# Altium PCB PCB1.PcbDoc
Units mm, origin at the board's own origin, x right, y up, seen from the top; angles counter-clockwise.
Board outline 101.09 x 149.61 mm, 2 copper layers (Top Layer, Bottom Layer); 126 components, 69 nets, 339 pads, 186 vias.
Unrouted connection lines stored in the file: 63.
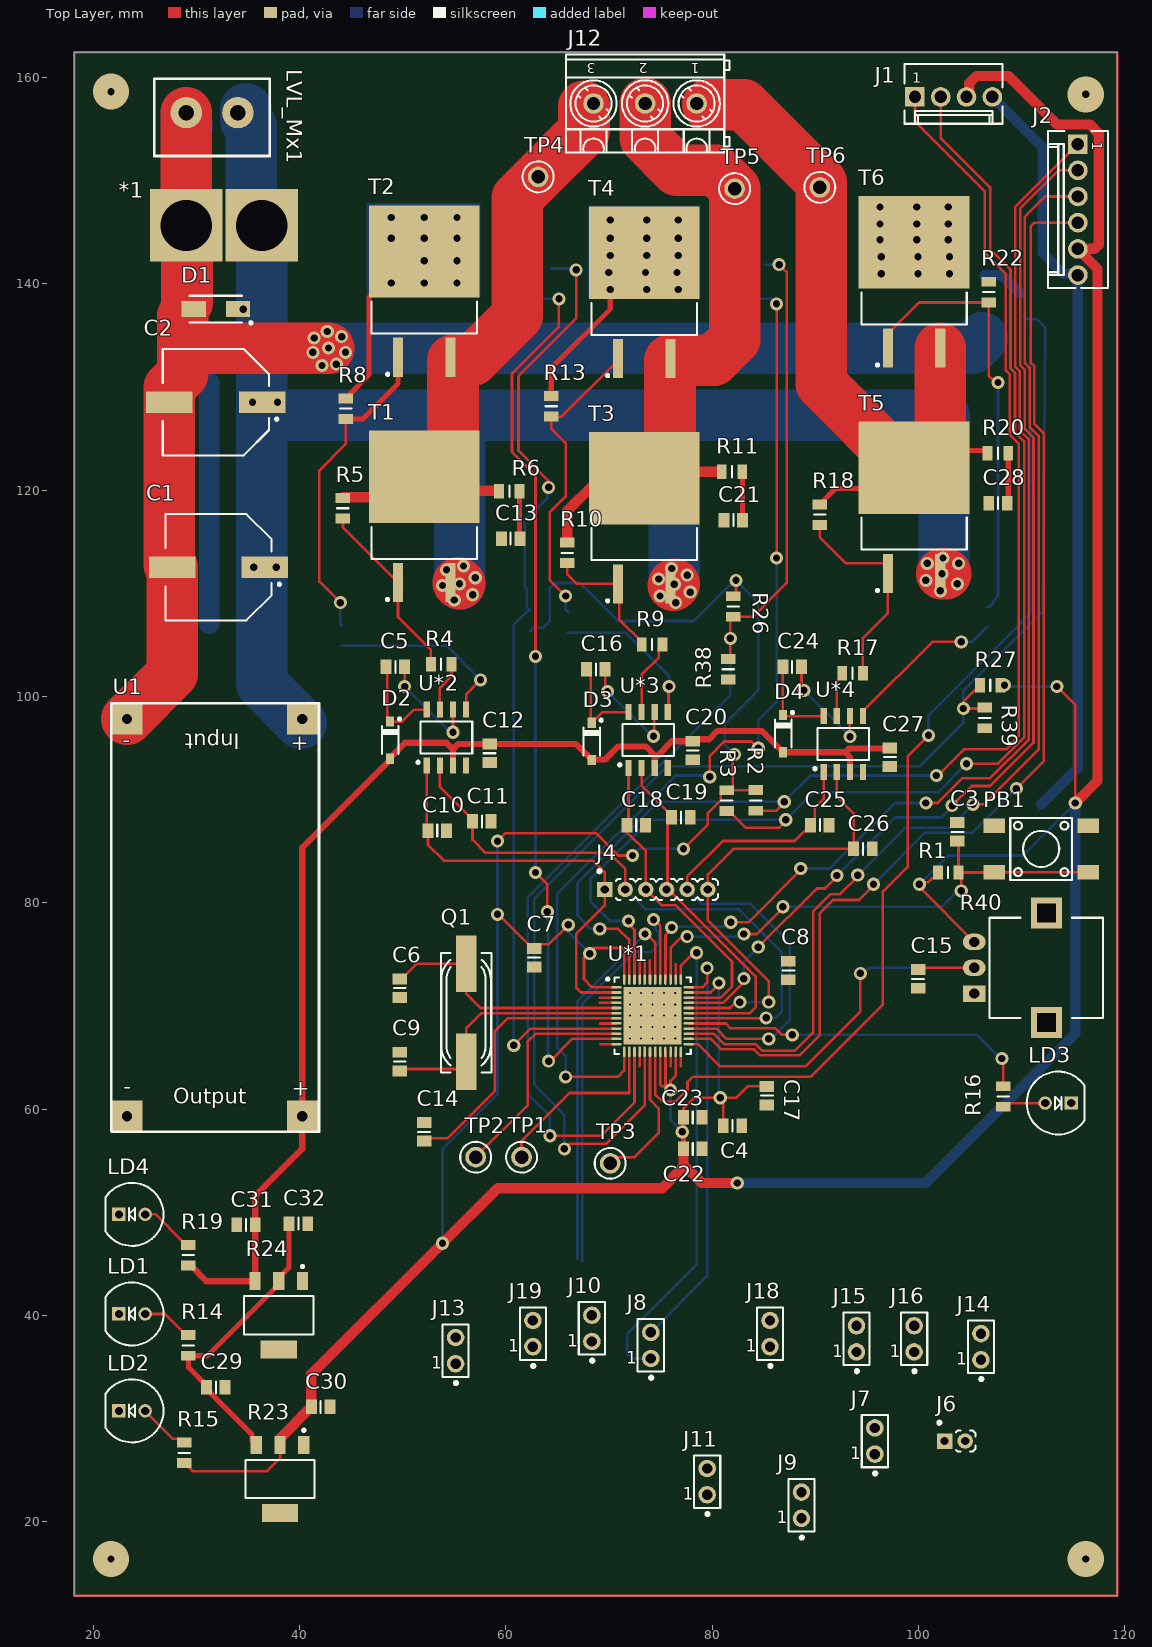
[diagram p0: Top Layer view]
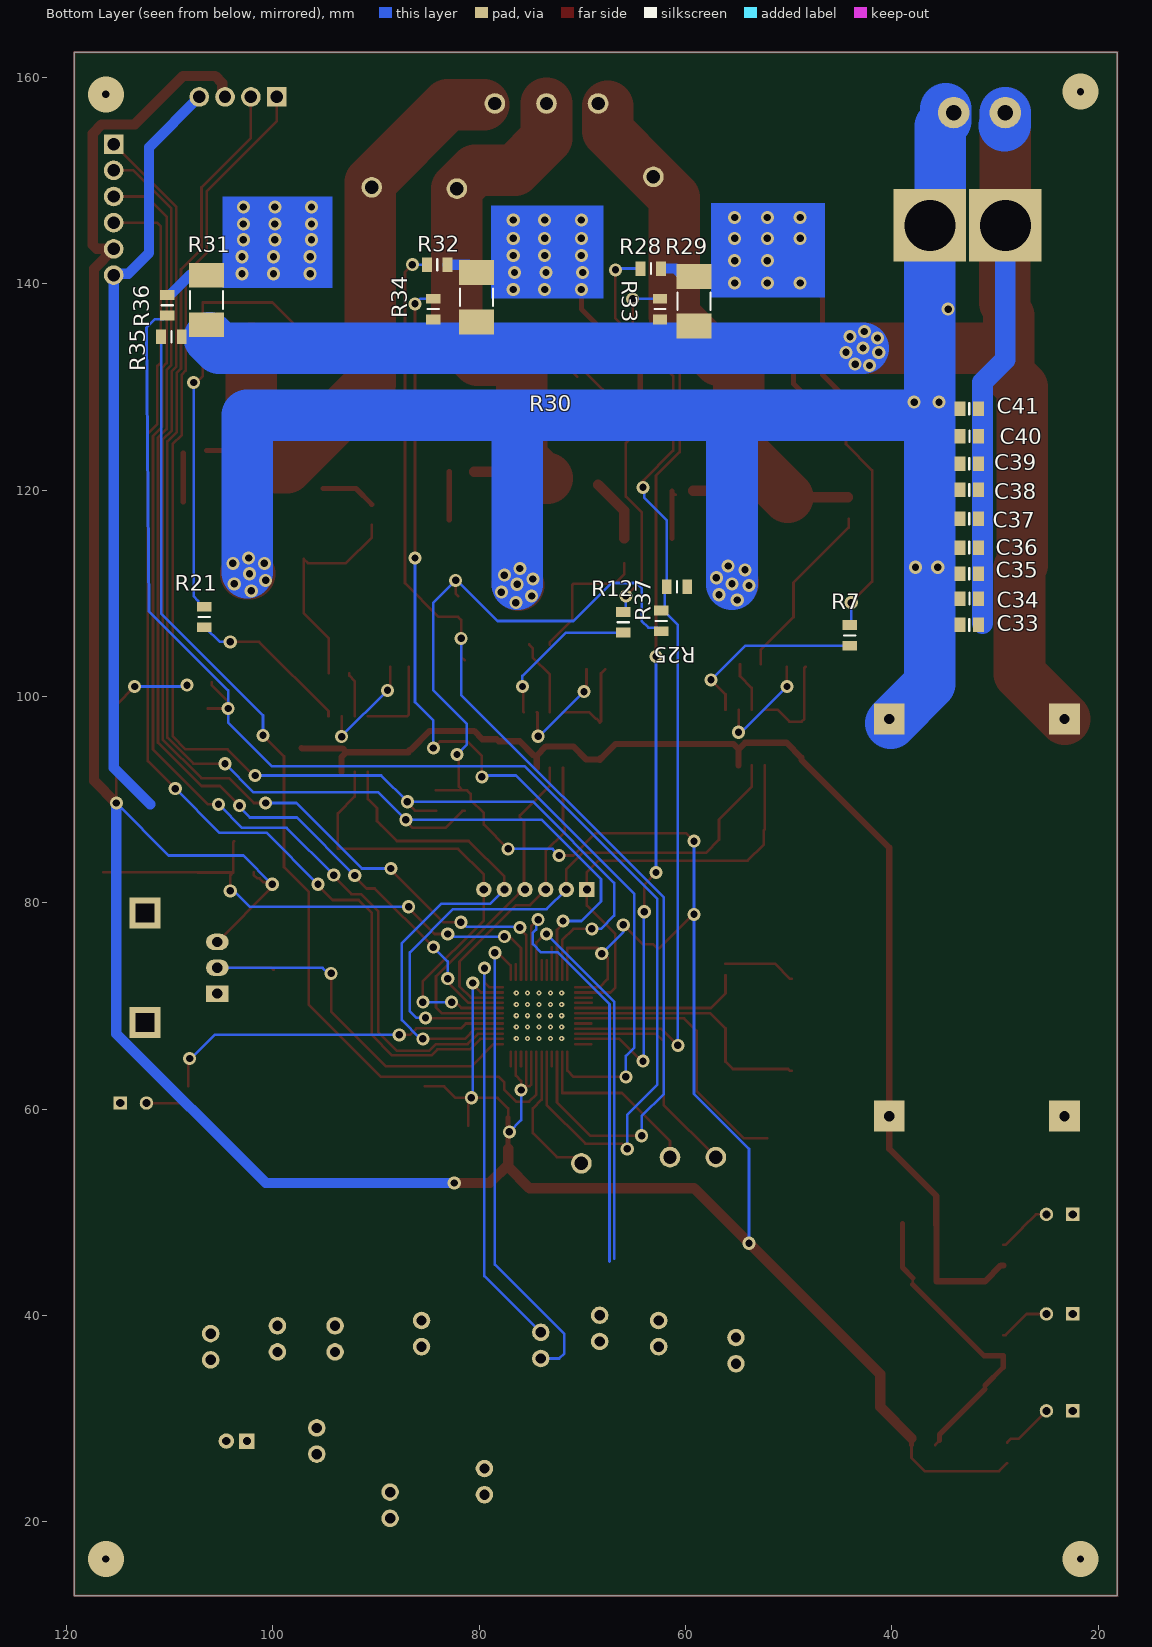
[diagram p1: Bottom Layer view, seen from below]
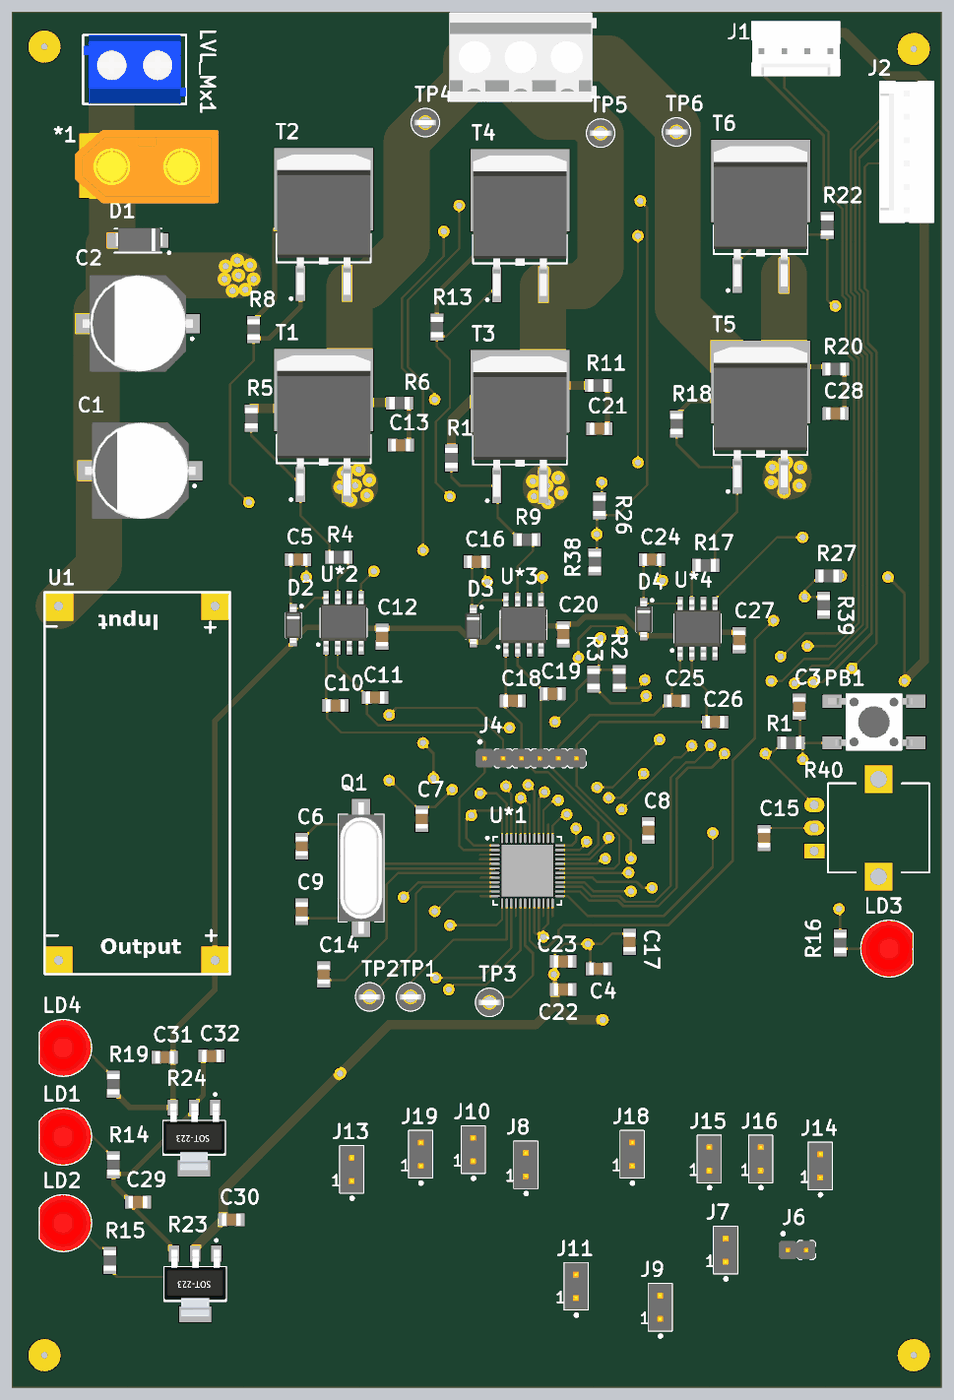
[diagram p2: 3D render of the assembled board from above, using the file's embedded part models]
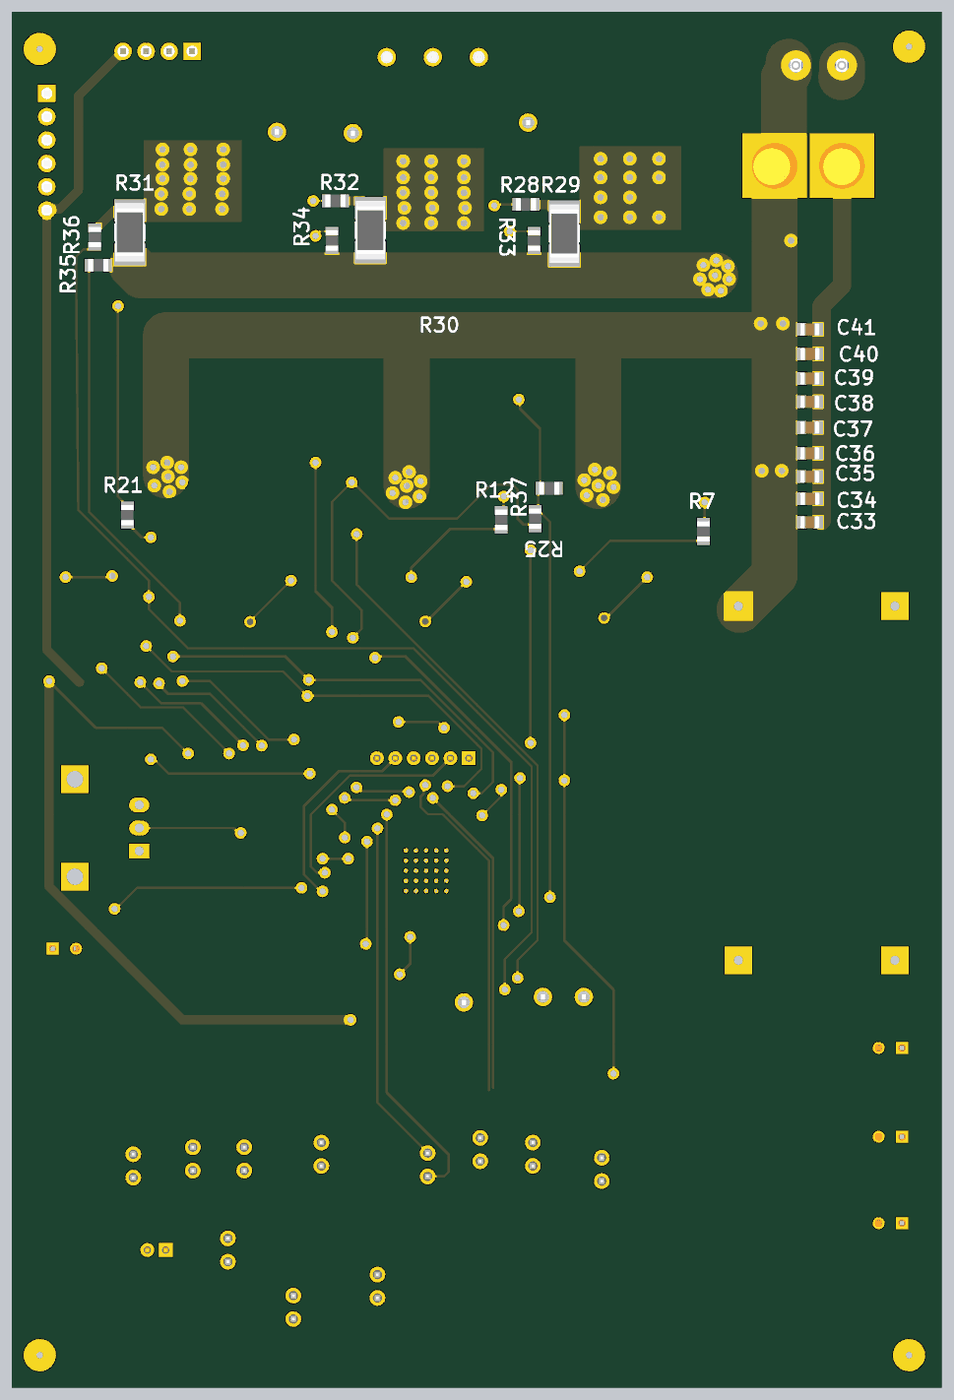
[diagram p3: 3D render of the assembled board from below, using the file's embedded part models]

## Layer stack, top to bottom
Top Solder: solder mask 0.0102, Solder Resist, Dk 3.5
Top Layer: signal copper 0.0356
Dielectric 1: dielectric 0.32, FR-4, Dk 4.8
Bottom Layer: signal copper 0.0356
Bottom Solder: solder mask 0.0102, Solder Resist, Dk 3.5

## Board outline
18.161,12.827 18.161,162.433 119.253,162.433 119.253,12.827

## Design rules (kind name [scope] priority, off if disabled: settings)
Clearance [All] p1: gap=0.2 ignorepadtopadclearanceinfootprint=FALSE
PolygonConnect [All] p1: connectstyle=Relief reliefconductorwidth=0.254 reliefentries=4 polygonreliefangle="90 Angle" airgapwidth=0.254
RoutingVias [All] p1: holewidth=0.711 width=1.27 viastyle="Through Hole" minholewidth=0.711 minwidth=1.27 maxholewidth=0.711 maxwidth=1.27
SolderMaskExpansion [All] p1: expansion=0.102
Width 10V [InNetClass('+10V')] p1: maxlimit=1.5 minlimit=0.5 preferedwidth=0.6
Width GND_width [InNet('GND')] p2: maxlimit=5 minlimit=0.254 preferedwidth=5
Width Power_width [InNetClass('Power')] p3: maxlimit=7 minlimit=3 preferedwidth=5
Width [All] p4: maxlimit=0.254 minlimit=0.2 preferedwidth=0.254
30 further rules are at their usual default settings.

## Classes and differential pairs
net class +10V: +10
net class GND: GND
net class Power: OUT1 OUT2 OUT3 V+ Vshunt_1+ Vshunt_2+ Vshunt_3+

## Components (designator, comment, footprint, x,y, rotation, side; value= is the part's Value field where it differs from the comment)
*1 "XT-60 Connector" XT-60 40.716,149.708 r180 top
C1 "680uF" CAPAE1030X1020N 32.131,112.522 r180 top
C2 "680uF" CAPAE1030X1020N 31.877,128.524 r180 top
C3 "10uF" CAPC2012X135N 103.759,86.868 r90 top
C4 "10uF" CAPC2012X135N 81.958,58.377 r180 top
C5 "10uF" CAPC2012X135N 49.276,102.87 r0 top
C6 "16pF" CAPC2012X135N 49.7,71.712 r90 top value=10uF
C7 "10uF" CAPC2012X135N 62.738,74.676 r90 top
C8 "10uF" CAPC2012X135N 87.376,73.426 r270 top
C9 "16pF" CAPC2012X135N 49.7,64.6 r270 top value=10uF
C10 "10uF" CAPC2012X135N 53.34,86.995 r180 top
C11 "10uF" CAPC2012X135N 57.658,87.884 r180 top
C12 "10uF" CAPC2012X135N 58.42,94.488 r90 top
C13 "10uF" CAPC2012X135N 60.452,115.3 r0 top
C14 "10uF" CAPC2012X135N 52.07,57.785 r270 top
C15 "10uF" CAPC2012X135N 99.949,72.612 r90 top
C16 "10uF" CAPC2012X135N 68.707,102.627 r0 top
C17 "10uF" CAPC2012X135N 85.3,61.298 r90 top
C18 "10uF" CAPC2012X135N 72.633,87.514 r180 top
C19 "10uF" CAPC2012X135N 76.962,88.276 r180 top
C20 "10uF" CAPC2012X135N 78.105,94.753 r90 top
C21 "10uF" CAPC2012X135N 82.042,117.094 r0 top
C22 "10uF" CAPC2012X135N 78.105,56.134 r180 top
C23 "10uF" CAPC2012X135N 78.105,59.182 r180 top
C24 "10uF" CAPC2012X135N 87.746,102.87 r0 top
C25 "10uF" CAPC2012X135N 90.424,87.514 r180 top
C26 "10uF" CAPC2012X135N 94.604,85.217 r180 top
C27 "10uF" CAPC2012X135N 97.226,94.107 r90 top
C28 "10uF" CAPC2012X135N 107.696,118.745 r0 top
C29 "10uF" CAPC2012X135N 31.877,33.02 r180 top
C30 "10uF" CAPC2012X135N 42.037,31.115 r180 top
C31 "10uF" CAPC2012X135N 34.798,48.768 r0 top
C32 "10uF" CAPC2012X135N 39.878,48.895 r180 top
C33 "15uF" CAPC2012X135N 32.501,106.934 r0 bottom value=1.2pF
C34 "15uF" CAPC2012X135N 32.49,109.474 r0 bottom value=1.2pF
C35 "15uF" CAPC2012X135N 32.501,111.887 r0 bottom value=1.2pF
C36 "15uF" CAPC2012X135N 32.501,114.427 r0 bottom value=1.2pF
C37 "15uF" CAPC2012X135N 32.501,117.221 r0 bottom value=1.2pF
C38 "15uF" CAPC2012X135N 32.501,120.015 r0 bottom value=1.2pF
C39 "15uF" CAPC2012X135N 32.501,122.555 r0 bottom value=1.2pF
C40 "15uF" CAPC2012X135N 32.49,125.222 r0 bottom value=1.2pF
C41 "15uF" CAPC2012X135N 32.501,127.889 r0 bottom value=1.2pF
D1 "ES1G-13-F" DIOM5226X230N 31.877,137.541 r180 top
D2 "=Device" SOD3716X135N 48.768,95.758 r270 top
D3 "=Device" SOD3716X135N 68.326,95.642 r270 top
D4 "=Device" SOD3716X135N 86.868,96.393 r270 top
J1 "KK®" MOLEX_22-04-1041 103.398,158.115 r0 top
J2 "KK®" MOLEX_22-27-2061 115.443,147.193 r270 top
J4 "=Family" HARWIN_M22-F2010605 69.565,81.28 r0 top
J6 "Header 2" HARWIN_M22-2010205 102.521,27.813 r0 top
J7 "Header 2" SAMTEC_TSW-101-23-L-D 95.758,27.813 r0 top
J8 "Header 2" SAMTEC_TSW-101-23-L-D 74.041,37.084 r0 top
J9 "Header 2" SAMTEC_TSW-101-23-L-D 88.646,21.59 r0 top
J10 "Header 2" SAMTEC_TSW-101-23-L-D 68.326,38.735 r0 top
J11 "Header 2" SAMTEC_TSW-101-23-L-D 79.502,23.876 r0 top
J12 "Terminal" WIELAND_25.161.0353.0 73.486,157.48 r180 top
J13 "Header 2" SAMTEC_TSW-101-23-L-D 55.118,36.576 r0 top
J14 "Header 2" SAMTEC_TSW-101-23-L-D 106.045,36.957 r0 top
J15 "Header 2" SAMTEC_TSW-101-23-L-D 93.98,37.719 r0 top
J16 "Header 2" SAMTEC_TSW-101-23-L-D 99.568,37.719 r0 top
J18 "Header 2" SAMTEC_TSW-101-23-L-D 85.598,38.227 r0 top
J19 "Header 2" SAMTEC_TSW-101-23-L-D 62.611,38.227 r0 top
LD1 "Red" LED_5MM_RED_1C-2A 23.749,40.132 r0 top
LD2 "Red" LED_5MM_RED_1C-2A 23.749,30.734 r0 top
LD3 "Red" LED_5MM_RED_1C-2A 113.538,60.579 r180 top
LD4 "Red" LED_5MM_RED_1C-2A 23.749,49.784 r0 top
LVL_Mx1 "Barrier Block 2 Conn" "2 Barrier Block 5mm" 34.107,157.691 r180 top
PB1 "Push Button" PB_TYCO_FSM2JSMA 111.887,85.217 r90 top
Q1 "10MHz" XTAL1160X490X430 56.134,69.342 r90 top
R1 "40k2" RESC2012X60N 102.87,82.931 r0 top
R2 "40k2" RESC2012X60N 84.201,89.916 r90 top
R3 "40k2" RESC2012X60N 81.407,89.9 r90 top
R4 "40k2" RESC2012X60N 53.721,103.124 r180 top
R5 "40k2" RESC2012X60N 44.196,118.237 r270 top
R6 "40k2" RESC2012X60N 60.325,119.888 r180 top
R7 "40k2" RESC2012X60N 44.069,105.918 r90 bottom
R8 "40k2" RESC2012X60N 44.45,127.889 r270 top
R9 "40k2" RESC2012X60N 74.168,105.029 r180 top
R10 "40k2" RESC2012X60N 65.956,113.919 r270 top
R11 "40k2" RESC2012X60N 81.915,121.777 r180 top
R12 "40k2" RESC2012X60N 66.04,107.188 r90 bottom
R13 "40k2" RESC2012X60N 64.389,128.127 r270 top
R14 "40k2" RESC2012X60N 29.21,37.084 r90 top
R15 "40k2" RESC2012X60N 28.829,26.67 r90 top
R16 "40k2" RESC2012X60N 108.204,61.214 r270 top
R17 "40k2" RESC2012X60N 93.599,102.235 r0 top
R18 "40k2" RESC2012X60N 90.424,117.618 r270 top
R19 "40k2" RESC2012X60N 29.21,45.831 r90 top
R20 "40k2" RESC2012X60N 107.696,123.571 r180 top
R21 "40k2" RESC2012X60N 106.68,107.696 r90 bottom
R22 "40k2" RESC2012X60N 106.807,139.192 r270 top
R23 "310030097" SOT-223 38.1,24.13 r180 top
R24 "310030096" SOT-223 37.973,40.005 r180 top
R25 "40k2" RESC2012X60N 62.357,107.315 r270 bottom
R26 "40k2" RESC2012X60N 82.042,108.712 r90 top
R27 "40k2" RESC2012X60N 106.948,101.092 r0 top
R28 "40k2" RESC2012X60N 63.373,141.478 r180 bottom
R29 "0.003" RESC6432X120N 59.182,138.303 r90 bottom value=390k
R30 "0.003" RESC6432X120N 80.264,138.684 r90 bottom value=390k
R31 "0.003" RESC6432X120N 106.426,138.43 r90 bottom value=390k
R32 "40k2" RESC2012X60N 84.074,141.859 r180 bottom
R33 "40k2" RESC2012X60N 62.484,137.541 r90 bottom
R34 "40k2" RESC2012X60N 84.455,137.541 r90 bottom
R35 "40k2" RESC2012X60N 109.843,134.874 r0 bottom
R36 "40k2" RESC2012X60N 110.236,137.922 r90 bottom
R37 "40k2" RESC2012X60N 60.833,110.617 r0 bottom
R38 "40k2" RESC2012X60N 81.534,102.632 r90 top
R39 "40k2" RESC2012X60N 106.426,97.917 r90 top
R40 "PTV09" PTV09A-1x30 105.395,71.194 r0 top
T1 "=Device" TO254P1524X483-3N-R750X1016 52.074,117.435 r90 top
T2 "=Device" TO254P1524X483-3N-R750X1016 52.074,139.279 r90 top
T3 "=Device" TO254P1524X483-3N-R750X1016 73.406,117.308 r90 top
T4 "=Device" TO254P1524X483-3N-R750X1016 73.406,139.152 r90 top
T5 "=Device" TO254P1524X483-3N-R750X1016 99.568,118.324 r90 top
T6 "=Device" TO254P1524X483-3N-R750X1016 99.568,140.168 r90 top
TP1 "Test Point" VERO_20-313145 61.511,55.329 r0 top
TP2 "Test Point" VERO_20-313145 57.066,55.329 r0 top
TP3 "Test Point" VERO_20-313145 70.104,54.737 r0 top
TP4 "Test Point" VERO_20-313145 63.119,150.368 r0 top
TP5 "Test Point" VERO_20-313145 82.169,149.225 r0 top
TP6 "Test Point" VERO_20-313145 90.424,149.352 r0 top
U1 "LM2596 Step Down Voltage regulator" "LM2596 DC-DC" 40.959,98.409 r180 top
U*1 "STM32G431CBT6" STM-UFQFPN48_M 74.211,69.045 r0 top
U*2 "L6387ED" SOIC127P600X175-8N 54.229,96.012 r90 top
U*3 "L6387ED" SOIC127P600X175-8N 73.787,95.769 r90 top
U*4 "L6387ED" SOIC127P600X175-8N 92.71,95.388 r90 top

## Footprints (in the part's own frame and the unit in brackets; to place one, negate y for a bottom-side part, rotate by r counter-clockwise, add the part's x,y. Pads: shape width x height; smd on the part's side, far side on the other; paste and mask are expansions set on the pad)
"2 Barrier Block 5mm" [mm]
  round 3.048 hole 1.5: 1(0.1,1.1) 2(5.1,1.1)
  silkscreen extent -3,-2.2 8.2,5.3, body extent -3,-2.2 8.16,5.3, height 10
CAPAE1030X1020N [mm] "Capacitor, Aluminium Electrolytric, 10.3mm L X 10.3mm W X 10.2mm H, IPC Medium Density"
  rect 4.5x2.1 smd: 1(-4.5,0) 2(4.5,0)
  silkscreen extent -6.03,-5.15 5.15,5.15, body extent -6,-5.25 6,5.25, height 10.2
CAPC2012X135N [mm] "Chip Capacitor, Body 2.0x1.25mm, IPC Medium Density"
  rect 1.05x1.4 smd: 1(-0.9,0) 2(0.9,0)
  silkscreen extent 0,-0.58 0,0.58, body extent -1.05,-0.67 1.05,0.68, height 1.25
DIOM5226X230N [mm] "DO-214-AC/SMA Diode, Molded Body; 5.195mm L X 2.605mm W X 2.30mm H, IPC Medium Density"
  rect 2.35x1.55 smd: 1(-2.15,0) 2(2.15,0)
  silkscreen extent -3.53,-1.3 2.55,1.45, body extent -2.75,-1.4 2.45,1.2, height 2.3
HARWIN_M22-2010205 [mm] "2 Contacts - Pitch 2mm - Single Row Through Mount Straight Header (Post Lead = 3.5mm, Tail Lead 3.4mm, Insulator 1.5mm)"
  rect 1.5x1.5 hole 0.8: 1(0,0)
  round 1.5 hole 0.8: 2(2,0)
  silkscreen extent -0.66,-1 3,1.93, body extent -1,-1 3,1, height 5
HARWIN_M22-F2010605 [mm] "6 Contacts, Pitch 2mm - SIL Vertical Pin Header"
  rect 1.5x1.5 hole 0.8: 1(0,0)
  round 1.5 hole 0.8: 2(2,0) 3(4,0) 4(6,0) 5(8,0) 6(10,0)
  silkscreen extent -0.66,-1 11,1.93, body extent -1,-1 11,1, height 5
LED_5MM_RED_1C-2A [mm] "LED, Red, Body Dia. 5.08mm, Pin spacing 2.54mm"
  rect 1.3x1.3 hole 0.8: 1(-1.27,0)
  round 1.3 hole 0.8: 2(1.27,0)
  silkscreen extent -2.56,-3.05 3.05,3.05, body extent -2.54,-3.05 3.05,3.05, height 14.32
"LM2596 DC-DC" [mm]
  rect 3x3 hole 1: 1(17.7,0.6) 2(0.7,0.6) 3(17.7,39.1) 4(0.7,39.1)
  silkscreen extent -0.91,-0.91 19.23,40.61, body extent -0.75,-0.89 19.25,40.51, height 12.8
MOLEX_22-04-1041 [mm] "2.5mm (.100\") Pitch KK® Header, Single Row, Vertical, 4 Circuits"
  rect 1.9x1.9 hole 1.2: 1(-3.75,0)
  round 1.9 hole 1.2: 2(-1.25,0) 3(1.25,0) 4(3.75,0)
  silkscreen extent -4.75,-2.6 4.75,3.2, body extent -4.75,-2.6 4.75,3.2, height 11.7
MOLEX_22-27-2061 [mm] "2.54mm (.100\") Pitch KK® Header, Single Row, Vertical, 6 Circuits"
  rect 1.9x1.9 hole 1.2: 1(-6.35,0)
  round 1.9 hole 1.2: 2(-3.81,0) 3(-1.27,0) 4(1.27,0) 5(3.81,0) 6(6.35,0)
  silkscreen extent -7.62,-2.9 7.62,2.9, body extent -7.62,-2.9 7.62,2.9, height 11.7
PB_TYCO_FSM2JSMA [mm] "Body 6mm x 6mm, Surface Mount Tactile Switches, TYCO FSMJSMA Series"
  rect 1.4x2.1 smd: 1(-2.25,4.55) 2(-2.25,-4.55) 3(2.25,4.55) 4(2.25,-4.55)
  silkscreen extent -3,-3 3,3, body extent -3,-5 3,5, height 4.39
PTV09A-1x30 [mm]
  rect 2.2x1.6 hole 1: 1(0,0)
  oval 2.2x1.6 hole 1: 2(0,2.5) 3(0,5)
  rect 3x3 hole 1.8 square: 4(7,-2.8) 4(7,7.8)
  silkscreen extent 1.5,-2.35 12.5,7.35, body extent -0.25,-2.85 12.5,7.85, height 30
RESC2012X60N [mm] "Chip Resistor, EIA 0805, Metric 2012, Body 2.0x1.2mm, IPC Medium Density"
  rect 0.95x1.4 smd: 1(-1,0) 2(1,0)
  silkscreen extent 0,-0.55 0,0.55, body extent -1.1,-0.67 1.1,0.68, height 0.6
RESC6432X120N [mm] "EIA 2512, Metric 6432, 2-Leads, Resistor, Chip; 6.35mm L X 3.20mm W X 1.20mm H, IPC Medium Density"
  rect 2.4x3.4 smd: 1(-2.4,0) 2(2.4,0)
  silkscreen extent -0.85,-1.6 0.85,1.6, body extent -3.17,-1.6 3.18,1.6, height 1.2
SAMTEC_TSW-101-23-L-D [mm] "2 Contacts - Pitch 2.54mm - Dual Row  Through Mount Straigh Header (Post Lead 5.84mm, Tail Lead 2.92mm, Insulator 2.54mm)"
  round 1.7 hole 1: 1(0,-1.27) 2(0,1.27)
  silkscreen extent -1.27,-3.28 1.27,2.54, body extent -1.27,-2.54 1.27,2.54, height 8.38
SOD3716X135N [mm] "SOD Diode (SOD-123), 2.70mm W X 1.60mm L X 1.35mm H body, IPC Medium Density"
  rect 1x0.8 smd: 1(-1.8,0) 2(1.8,0)
  silkscreen extent -2.17,-0.8 1.35,1.03, body extent -1.95,-0.85 1.95,0.85, height 1.35
SOIC127P600X175-8N [mm] "SOIC 8, Pitch 1.27mm - Body 4x5mm, IPC Medium Density"
  rect 1.55x0.6 smd: 1(-2.7,1.905) 2(-2.7,0.635) 3(-2.7,-0.635) 4(-2.7,-1.905) 5(2.7,-1.905) 6(2.7,-0.635) 7(2.7,0.635) 8(2.7,1.905)
  silkscreen extent -2.52,-2.5 1.55,2.88, body extent -3.1,-2.5 3.1,2.5, height 1.75
SOT-223 [mm] "SOT-223/SC-73; 4 Leads; Body 6.7 x 7.3 mm, inc. leads (LxW max)"
  rect 1.1x1.75 smd: 1(-2.3,-3.3) 2(0,-3.3) 3(2.3,-3.3)
  rect 3.5x1.75 smd: 4(0,3.3)
  silkscreen extent -3.35,-4.85 3.35,1.85, body extent -3.35,-3.7 3.35,3.5, height 1.85
STM-UFQFPN48_M [mm] "QFN, 48-Leads, Body 7.1x7.1mm, Pitch 0.5mm, Thermal Pad 5.6x5.6mm, IPC Low Density"
  oval 1x0.25 smd: 1(-3.5,2.75) 2(-3.5,2.25) 3(-3.5,1.75) 4(-3.5,1.25) 5(-3.5,0.75) 6(-3.5,0.25) 7(-3.5,-0.25) 8(-3.5,-0.75) 9(-3.5,-1.25) 10(-3.5,-1.75) 11(-3.5,-2.25) 12(-3.5,-2.75) 25(3.5,-2.75) 26(3.5,-2.25) 27(3.5,-1.75) 28(3.5,-1.25) 29(3.5,-0.75) 30(3.5,-0.25) 31(3.5,0.25) 32(3.5,0.75) 33(3.5,1.25) 34(3.5,1.75) 35(3.5,2.25) 36(3.5,2.75)
  oval 0.25x1 smd: 13(-2.75,-3.5) 14(-2.25,-3.5) 15(-1.75,-3.5) 16(-1.25,-3.5) 17(-0.75,-3.5) 18(-0.25,-3.5) 19(0.25,-3.5) 20(0.75,-3.5) 21(1.25,-3.5) 22(1.75,-3.5) 23(2.25,-3.5) 24(2.75,-3.5) 37(2.75,3.5) 38(2.25,3.5) 39(1.75,3.5) 40(1.25,3.5) 41(0.75,3.5) 42(0.25,3.5) 43(-0.25,3.5) 44(-0.75,3.5) 45(-1.25,3.5) 46(-1.75,3.5) 47(-2.25,3.5) 48(-2.75,3.5)
  rect 5.6x5.6 smd: 49(0,0)
  silkscreen extent -4.47,-3.7 3.7,3.7, body extent -3.55,-3.55 3.55,3.55, height 0.6
TO254P1524X483-3N-R750X1016 [mm] "D2PAK TO-263A, TO, 2.54mm pitch; 2 pin, 15.24mm L X 10.425mm W X 4.83mm H body, IPC Medium Density"
  rect 3.8x1 smd: 1(-6.4,2.54) 2(-6.4,-2.54)
  rect 8.95x10.75 smd: 3(3.85,0)
  silkscreen extent -8.17,-5.1 -1,5.1, body extent -7.62,-5.08 7.62,5.08, height 4.83
VERO_20-313145 [mm] "Black Bead PCB Terminal Test Pin (1.32 mm hole) for 2.4mm  PCB Thickness"
  round 2 hole 1.3: 1(0,0)
  silkscreen extent -1.5,-1.5 1.5,1.5, body extent -1.5,-1.5 1.5,1.5, height 5.4
WIELAND_25.161.0353.0 [mm] "Terminal Block, Pitch 5mm, 3 Positions, Screw Connection"
  round 2 hole 1.3: 1(-5,0) 2(0,0) 3(5,0)
  silkscreen extent -8.18,-4.75 7.68,4.75, body extent -8.17,-4.75 7.68,4.75, height 15
XT-60 [mm] "Battery Connector"
  rect 7x7 hole 4.95: 1(4.394,4.039) 2(11.709,4.039)
  body extent 0.07,0.13 15.67,8.13, height 16.4
XTAL1160X490X430 [mm] "HC49/4H SMX Case, SMD Cristal, Body 11.6x4.9mm"
  rect 5.5x2 smd: 1(-4.75,0) 2(4.75,0)
  silkscreen extent -5.8,-2.45 5.8,2.45, body extent -7.15,-2.45 7.15,2.45, height 4.3

## Part data
*1: Colour=yellow, Manufacturer=POLOLU, Manufacturer Part Number="XT60 YELLOW", Maximum current=65A, Category="Power Supply Modules", ComponentLink1Description=http://static.tme.eu/products_pics/8/b/5/8b5040a8a5baf3e0e67386c2e3a9b903/913.jpg, ComponentLink1URL=http://static.tme.eu/products_pics/8/b/5/8b5040a8a5baf3e0e67386c2e3a9b903/913.jpg, Information="Product is not a working device, but only component", MinAmount=1, Multiples=1, Number of pins=2, Price Type=NET, Pricing 1="1=2.08, 10=1.95 (USD)", Stock 1=29, SuppliedAmount=0, Supplier 1=TME, Supplier Part Number 1="XT-60 Connector", Type of robotics accessories="power connector", Unit=pcs, Weight=7.267
C1 C2: library part CAE1030-1020_680UF_4V_20%, "Polarised capacitor", Case=F8, Manufacturer=PANASONIC, Manufacturer Part Number=4SVP680M, Tolerance=±20%, Voltage=4V, Author="CERN DEM MR", ComponentHeight=10.2mm, Component Type=Standard, CreateDate=23.03.2016, HelpURL=\\cern.ch\dfs\Applications\Altium\Datasheets\CAE_PANASONIC_SVP.pdf, LatestRevisionDate=23.03.2016, Mounted=Yes, Part Description="Aluminum Electrolytic SMT Capacitor", Part Number=CAE1030-1020_680UF_4V_20%, Pin Count=2, Sense=No, SMD=Yes, Socket=No, Status="Not Recommended"
C3 C4 C5 C6 C7 C8 C9 C10 C11 C12 C13 C14 C15 C16 C17 C18 C19 C20 C21 C22 C23 C24 C25 C26 C27 C28 C29 C30 C31 C32: library part CC0805_10UF_10V_10%_X7R, "Non-polarised capacitor", Case=0805, Manufacturer=GENERIC, Manufacturer1 ComponentHeight=1.35mm, Manufacturer1 Example=MURATA, Manufacturer1 Part Number=GRM21BR71A106KE51L, Tolerance=±10%, Voltage=10V, Author="CERN DEM JLC", Component Type=Standard, CreateDate=30.04.2012, HelpURL=\\cern.ch\dfs\Applications\Altium\Datasheets\CC0805_X7R_MURATA.pdf, LatestRevisionDate=30.04.2012, Manufacturer Part Number=CC0805_10UF_10V_10%_X7R, Mounted=Yes, Part Description="SMD Multilayer Chip Ceramic Capacitor", Part Number=CC0805_10UF_10V_10%_X7R, Pin Count=2, Sense=No, SMD=Yes, Socket=No, Status=Preferred, TC=X7R
C33 C34 C35 C36 C37 C38 C39 C40 C41: library part CC0805_1.2PF_50V_0.25PF_NP0, "Non-polarised capacitor", Case=0805, Manufacturer=GENERIC, Manufacturer1 ComponentHeight=1.35mm, Manufacturer1 Example=PHYCOMP, Manufacturer1 Part Number=223886114128, Tolerance=±0.25pF, Voltage=50V, Author="CERN DEM JLC", Component Type=Standard, CreateDate=03.12.2007, HelpURL=\\cern.ch\dfs\Applications\Altium\Datasheets\CC0805_NP0_PHYCOMP.pdf, LatestRevisionDate=03.12.2007, Manufacturer Part Number=CC0805_1.2PF_50V_0.25PF_NP0, Mounted=Yes, Part Description="SMD Multilayer Chip Ceramic Capacitor", Part Number=CC0805_1.2PF_50V_0.25PF_NP0, Pin Count=2, Sense=No, SMD=Yes, Socket=No, Status="Not Recommended", TC=C0G/NP0
D1: "Diode", Case=DO-214AC, Manufacturer="DIODES INCORPORATED", Power=1A, Voltage=400V, Author="CERN DEM JLC", Bonding=No, ComponentHeight=2.30mm, Component Type=Standard, CreateDate=15.09.2014, Device=ES1G-13-F, HelpURL=\\cern.ch\dfs\Applications\Altium\Datasheets\ES1G-13-F.pdf, LatestRevisionDate=15.09.2014, Manufacturer Part Number=ES1G-13-F, Mounted=Yes, PackageDescription="DO-214-AC/SMA Diode, Molded Body; 5.195mm L X 2.605mm W X 2.30mm H, IPC Medium Density", Part Description="Surface Mount Super-Fast Rectifier", Part Number=ES1G-13-F, Pin Count=2, PressFit=No, Sense=No, SMD=Yes, Socket=No
D2 D3 D4: library part "Diode Schottky", "Schottky Diode"
J1: library part MOLEX_22-04-1041, "Connector 4 Male", Manufacturer=MOLEX, Manufacturer Part Number=22-04-1041, Author="CERN DEM JLC", ComponentHeight=11.7mm, Component Type=Standard, CreateDate=09.02.2012, Family=KK®, HelpURL=\\cern.ch\dfs\Applications\Altium\Datasheets\MOLEX_22-04-1041.pdf, LatestRevisionDate=09.02.2012, Mounted=Yes, Part Description="2.5mm (.100\") Pitch KK® Wire-to-Board Header, Vertical, with Friction Lock, 4 Circuits, Tin (Sn) Plating", Part Number=MOLEX_22-04-1041, Pin Count=4, PressFit=No, Sense=No, SMD=No, Socket=No, Status=None
J2: library part MOLEX_22-27-2061, "Connector 6 Male", Manufacturer=MOLEX, Manufacturer Part Number=22-27-2061, Author="CERN DEM JMW", ComponentHeight=11.7mm, Component Type=Standard, CreateDate=30.11.2011, Family=KK®, HelpURL=\\cern.ch\dfs\Applications\Altium\Datasheets\MOLEX_22-27-2061.pdf, LatestRevisionDate=30.11.2011, Mounted=Yes, Part Description="2.54mm (.100\") Pitch KK® Wire-to-Board Header, Vertical, with Friction Lock, 6 Circuits, Tin (Sn) Plating", Part Number=MOLEX_22-27-2061, Pin Count=6, PressFit=No, Sense=No, SMD=No, Socket=No, Status=None
J4: library part HARWIN_M22-F2010605, "Connector 6 Male", Manufacturer=HARWIN, Manufacturer Part Number=M22-F2010605, Author="CERN DEM JLC", ComponentHeight=5mm, Component Type=Standard, CreateDate=14.09.2011, HelpURL=\\cern.ch\dfs\Applications\Altium\Datasheets\HARWIN_M22-F2010605.pdf, LatestRevisionDate=06.12.2012, Mounted=Yes, Part Description="6 Contacts - Pitch 2mm - Single Row Through Mount Straight Header (Post Lead = 3.5mm, Tail Lead 3.4mm, Insulator 1.5mm)", Part Number=HARWIN_M22-F2010605, Pin Count=6, PressFit=No, Sense=No, SMD=No, Socket=No, Status=None
J6: library part HARWIN_M22-2010205, "Connector 2 Male", Manufacturer=HARWIN, Manufacturer Part Number=M22-2010205, Author="CERN DEM JLC", ComponentHeight=5mm, Component Type=Standard, CreateDate=14.04.2015, Family="Header 2", HelpURL=\\cern.ch\dfs\Applications\Altium\Datasheets\HARWIN_M22-2010205.pdf, LatestRevisionDate=14.04.2015, Mounted=Yes, Part Description="2 Contacts - Pitch 2mm - Single Row Through Mount Straight Header (Post Lead = 3.5mm, Tail Lead 3.4mm, Insulator 1.5mm)", Part Number=HARWIN_M22-2010205, Pin Count=2, PressFit=No, Sense=No, SMD=No, Socket=No, Status=None
J7 J8 J9 J10 J11 J13 J14 J15 J16 J18 J19: library part SAMTEC_TSW-101-23-L-D, "Connector 2 Male", Manufacturer=SAMTEC, Manufacturer Part Number=TSW-101-23-L-D, Author="CERN DEM MR", ComponentHeight=8.38mm, Component Type=Standard, CreateDate=08.03.2017, Family="Header 2", HelpURL=\\cern.ch\dfs\Applications\Altium\Datasheets\SAMTEC_TSW-101-23-L-D.pdf, LatestRevisionDate=08.03.2017, Mounted=Yes, Part Description="2 Contacts, Pitch 2.54mm, Dual Row  Through Mount Straight Header (Post Lead 5.84mm, Tail Lead 2.92mm, Insulator 2.54mm)", Part Number=SAMTEC_TSW-101-23-L-D, Pin Count=2, PressFit=No, Sense=No, SMD=No, Socket=No, Status=None
J12: library part WIELAND_25.161.0353.0, "Terminal Block, 3 Positions, Screw Connection", Manufacturer=WIELAND, Manufacturer Part Number=25.161.0353.0, Author="CERN DEM JLC", ComponentHeight=15mm, Component Type=Standard, CreateDate=02.06.2009, Family=Terminal, HelpURL=\\cern.ch\dfs\Applications\Altium\Datasheets\WIELAND_25.161.0353.0.pdf, LatestRevisionDate=02.06.2009, Mounted=Yes, Part Description="16A 250VAC 3 Way PCB Terminal Block, Pitch 5mm, Screw Connection, Wire Size Max: 2.5mm?", Part Number=WIELAND_25.161.0353.0, Pin Count=3, PressFit=No, Sense=No, SMD=No, Socket=No, Status=None
LD1 LD2 LD3 LD4: library part LED_AVAGO_HLMP-3301, "LED Red 1C 2A", Manufacturer="AVAGO TECHNOLOGIES", Manufacturer Part Number=HLMP-3301, Author="CERN DEM JLC", Bonding=No, Color=Red, ComponentHeight=9.19mm(min), Component Type=Standard, CreateDate=12.06.2008, HelpURL=\\cern.ch\dfs\Applications\Altium\Datasheets\LED_AVAGO_HLMP-3301.pdf, LatestRevisionDate=17.03.2010, Mounted=Yes, PackageDescription="LED, Red, Body Dia. 5.08mm, Pin spacing 2.54mm", Part Description="5mm High Efficiency Red LED", Part Number=LED_AVAGO_HLMP-3301, Pin Count=2, PressFit=No, Sense=No, SMD=No, Socket=No
LVL_Mx1: library part "Barrier Block 2 Conn_1"
PB1: library part PB_TYCO_FSM2JSMA, "Push-Button Switch SPDT", Manufacturer="TYCO ELECTRONICS", Manufacturer Part Number="FSM2JSMA or  2-1437565-7", Author="CERN DEM JLC", ComponentHeight=4.59mm, Component Type=Standard, CreateDate=08.09.2008, Family="Push Button", HelpURL=\\cern.ch\dfs\Applications\Altium\Datasheets\PB_TYCO_FSM2JSMA.pdf, LatestRevisionDate=21.06.2012, Mounted=Yes, PackageDescription="Body 6mm x 6mm, Surface Mount Tactile Switches, TYCO ALCOSWITCH FSMJSMA Series", Part Description="12VDC 50mA SPST Tactile  Push-Button Switch", Part Number=PB_TYCO_FSM2JSMA, Pin Count=4, PressFit=No, Sense=No, SMD=Yes, Socket=No, Status=None
Q1: library part XTAL_10MHZ_IQD_LFXTAL003166, "Quartz Crystal", Manufacturer="IQD FREQUENCY PRODUCTS", Manufacturer Part Number="LF XTAL003166", Author="CERN DEM JLC", Bonding=No, ComponentHeight=4.3mm, Component Type=Standard, CreateDate=19.04.2012, HelpURL=\\cern.ch\dfs\Applications\Altium\Datasheets\XTAL_IQD_LFXTAL003166.pdf, LatestRevisionDate=07.11.2016, Mounted=Yes, PackageDescription="HC49/4H SMX Case, SMD Cristal, Body 11.6x4.9mm", Part Description="Tolerance:± 30ppm, Stability:± 50ppm, -10°C to +60°C, 16pF, Surface Mount Quartz Crystal, HC49/4HSMX Series", Part Number=XTAL_10MHZ_IQD_LFXTAL003166, Pin Count=2, PressFit=No, Sense=No, SMD=Yes, Socket=No
R1 R2 R3 R4 R5 R6 R7 R8 R9 R10 R11 R12 R13 R14 R15 R16 R17 R18 R19 R20 R21 R22 R25 R26 R27 R28 R32 R33 R34 R35 R36 R37 R38 R39: library part R0805_40K2_1%_0.125W_100PPM, "Resistor - 1%", Case=0805, Manufacturer=VISHAY, Manufacturer1 ComponentHeight=0.6mm, Manufacturer1 Part Number=CRCW080540K2FKEA, Power=0.125W, Tolerance=±1%, Author="CERN DEM JLC", Component Type=Standard, CreateDate=18.04.2013, HelpURL=\\cern.ch\dfs\Applications\Altium\Datasheets\R2512_VISHAY_CRCW0805.pdf, LatestRevisionDate=18.04.2013, Manufacturer1 Example=VISHAY, Manufacturer Part Number=R0805_40K2_1%_0.125W_100PPM, Mounted=Yes, Part Description="Thick Film Chip Resistor", Part Number=R0805_40K2_1%_0.125W_100PPM, Pin Count=2, PressFit=No, Sense=No, SMD=Yes, Socket=No, Status=None, TC=±100ppm/°C
R23: library part PMIC-CJT1117-3.3(SOT223), MPN=CJT1117-3.3
R24: library part PMIC-CJT1117-5.0(SOT223), MPN=CJT1117-5.0
R29 R30 R31: library part R2512_390K_1%_3W_100PPM_TYCO_3522, "Resistor - 1%", Case=2512, Manufacturer=TYCO, Manufacturer Part Number="1-2176232-2 (3522390KFT)", Power=3W, Tolerance=±1%, Author="CERN DEM JLC", ComponentHeight=1.2mm, Component Type=Standard, CreateDate=12.07.2017, HelpURL=\\cern.ch\dfs\Applications\Altium\Datasheets\R2512_TYCO_3522.pdf, LatestRevisionDate=12.07.2017, Mounted=Yes, Part Description="SMD Power Resistor", Part Number=R2512_390K_1%_3W_100PPM_TYCO_3522, Pin Count=2, PressFit=No, Sense=No, SMD=Yes, Socket=No, Status=None, TC=±100ppm/°C
R40: "PTV09 Series - 9 mm Potentiometer"
T1 T2 T3 T4 T5 T6: library part "N-MOSFET-DZ 1G 2D 3S", "N-CHANNEL MOSFET WITH ZENER DIODE"
TP1 TP2 TP3 TP4 TP5 TP6: library part VERO_20-313145, Manufacturer="VERO TECHNOLOGIES", Manufacturer Part Number=20-313145, Author="CERN DEM JLC", ComponentHeight=5.3mm, Component Type=Standard, CreateDate=15.07.2013, Family="Test Point", HelpURL=\\cern.ch\dfs\Applications\Altium\Datasheets\VERO_20-313145.pdf, LatestRevisionDate=15.07.2013, Mounted=Yes, Part Description="Black Bead PCB Terminal Test Pin for 2.4mm PCB Thickness (1.32mm Hole)", Part Number=VERO_20-313145, Pin Count=1, PressFit=No, Sense=No, SMD=No, Socket=No, Status=None
U1: library part "LM2596 Step Down Board"

## Via types
v1: diameter 1.27, hole 0.711, Top Layer to Bottom Layer, 157 vias
v2: diameter 0.5, hole 0.2, Top Layer to Bottom Layer, 25 vias
v3: diameter 3.5, hole 0.711, Top Layer to Bottom Layer, 4 vias

## Nets (pads, with @x,y where several pads share a name; then routed paths per layer and width w, separated by ;. In a path a pad name is that pad's centre, name@x,y a point inside that pad or via, vN(x,y) a via of type N, cw(c..) or ccw(c..) an arc to the next point about the centre after c; other vN are vias at no path point)
+3.3: C4.2 C7.2 C8.2 C17.2 C22.2 C23.2 C30.2 J1.3 J2.5 J13.2 J16.1 R1.1 R2.2 R3.2 R15.1 R23.2 R25.2 R26.2 R27.2 R40.3 U*1.1 U*1.20 U*1.21 U*1.23 U*1.35 U*1.48 | length 458
  Top Layer w0.254: R15.1 29.607,24.892 36.83,24.892 38.1,26.162 R23.2 ; v1(59.182,78.867) 59.272,78.867 62.563,75.576 C7.2 63.136,75.974 64.163,75.974 v1(66.04,77.851) ; v1(59.182,85.968) 59.955,86.741 68.714,86.741 70.873,84.582 v1(72.263,84.582) ; U*1.1 68.359,71.795 67.564,72.59 67.564,74.676 68.493,75.605 71.461,75.605 U*1.48 ; U*1.20 74.961,62.356 75.11,62.207 v1@75.461,62.207 ; U*1.21 v1@75.461,62.207 ; U*1.23 76.461,63.253 75.946,62.738 v1(75.946,61.849) 75.946,61.722 v1@75.461,62.207 ; C23.2 77.205,60.06 78.232,61.087 v1(80.772,61.087) v1@81.058,61.087 ; v1(77.205,85.217) 79.565,87.577 79.565,88.695 80.834,89.964 80.834,90.552 81.182,90.9 R3.2 R3.2@81.632,90.9 ; U*1.35 79.851,71.295 v1@80.638,72.082 ; C4.2 v1@81.058,61.087 ; R26.2 82.296,109.966 v1(82.296,111.252) ; v1(82.169,94.361) 81.98,94.172 81.98,91.248 R3.2@81.632,90.9 ; R2.2 84.185,90.9 R3.2@81.632,90.9 ; C17.2 83.407,62.198 82.296,61.087 v1@81.058,61.087 ; R1.1 101.87,82.706 101.522,82.358 101.297,82.358 100.921,81.982 100.27,81.982 v1(100.076,81.788) 100.076,81.513 R40.3 ; J1.3 J1.3@104.916,158.383 ; v1(113.411,100.965) 115.189,99.187 v1(115.189,89.662)
  Top Layer w0.5: R23.2 R23.2@38.1,28.078 ; 77.205,54.388 77.205,54.61 ; C22.2 C23.2
  Top Layer w1: R23.2@38.1,28.078 C30.2 41.137,34.279 v1(53.848,46.99) 59.182,52.324 75.141,52.324 77.205,54.388 ; C22.2 77.205,54.61 78.983,52.832 v1(82.423,52.832) ; J1.3@104.916,158.383 104.916,159.446 105.616,160.147 108.712,160.147 113.411,155.448 116.586,155.448 117.475,154.559 117.475,143.764 117.094,143.383 J2.5 117.348,141.478 117.348,91.821 v1(115.189,89.662)
  Bottom Layer w0.254: v1@53.721,46.99 53.848,47.117 53.848,56.134 59.182,61.468 v1(59.182,78.867) v1(59.182,85.968) ; R25.2 62.705,106.663 63.61,106.663 64.262,107.315 64.262,110.49 64.77,110.998 67.183,110.998 70.866,107.315 78.232,107.315 v1@82.169,111.252 ; v1(66.04,77.851) 66.04,77.143 v1(68.126,75.057) ; v1(72.263,84.582) 72.898,85.217 v1(77.205,85.217) ; v1(75.946,61.849) 75.946,58.928 v1(77.089,57.785) ; v1@80.638,61.348 v1(80.638,72.209) ; v1(82.169,94.361) 81.226,95.304 81.226,97.355 84.455,100.584 84.455,109.093 v1(82.296,111.252) ; v1(100.076,81.788) 102.87,84.582 110.109,84.582 v1(115.189,89.662) ; v1@108.204,100.965 v1(113.411,100.965)
  Bottom Layer w1: v1(82.423,52.832) 100.711,52.832 115.189,67.31 v1(115.189,89.662)
  other v1: 108.331,101.092
+5: C29.2 C32.2 J15.1 J18.1 J18.2 R14.1 R23.3 R24.2 | length 29.3
  Top Layer w0.254: C29.2@30.977,32.845 C29.2 C29.2@30.977,33.195 ; R23.3@35.377,27.853 R23.3 ; R24.2@37.973,42.98 R24.2 R24.2@37.973,43.63
  Top Layer w0.5: C29.2@30.977,32.845 35.377,28.445 R23.3@35.377,27.853 ; C29.2@30.977,33.195 29.21,34.962 R14.1 31.077,36.084 R24.2@37.973,42.98 ; R24.2@37.973,43.63 38.978,44.635 C32.2
+10: C12.2 C20.2 C27.2 C31.2 D2.2 D3.2 D4.2 R19.1 R24.3 U1.4 U*2.3 U*3.3 U*4.3 | length 121.3
  Top Layer w0.6: R19.1 29.435,44.831 30.961,43.305 R24.3 35.686,43.317 35.686,48.756 C31.2 35.698,51.573 40.259,56.134 U1.4 40.259,85.349 48.768,93.858 D2.2 48.768,94.058 50.214,95.504 54.229,95.504 54.864,94.869 ; U*2.3 54.864,94.869 ; U*3.3 74.422,94.266 ; U*4.3 93.345,94.139 92.891,94.593 ; C27.2 97.18,94.961 93.259,94.961 92.891,94.593 ; 54.864,94.869 55.383,95.388 C12.2 66.78,95.388 68.126,94.042 68.226,94.042 68.326,93.942 D3.2 68.367,93.883 69.626,93.883 70.889,95.146 73.542,95.146 74.422,94.266 ; 74.422,94.266 74.697,94.266 76.084,95.653 C20.2 78.302,95.85 79.705,95.85 80.502,96.647 84.814,96.647 86.668,94.793 86.768,94.793 86.868,94.693 D4.2 92.891,94.593
BUTTON: C3.1 PB1.1 PB1.2 R1.2 U*1.39 | length 51
  Top Layer w0.254: U*1.39 75.961,75.609 77.06,76.708 v1@77.343,76.708 ; v1(83.058,76.962) 84.328,76.962 86.846,79.48 v1(86.846,79.607) v1@86.846,79.756 ; C3.1 103.87,85.857 R1.2 ; v1(104.14,81.153) 104.14,82.661 R1.2 ; PB1.2 PB1.1 107.301,82.931 R1.2
  Bottom Layer w0.254: v1(77.565,76.708) 82.677,76.708 v1@82.931,76.962 ; v1(86.846,79.607) 102.213,79.607 103.759,81.153 104.013,81.153 v1@104.14,81.28
Curr_fdbk1_OPAmp+: R25.1 R28.1 R37.2 U*1.9 | length 93.8
  Top Layer w0.254: v1(60.751,66.167) 62.379,67.795 U*1.9 ; v1(64.135,120.269) 64.135,120.904 61.214,123.825 61.214,131.064 66.802,136.652 v1(66.802,141.351)
  Bottom Layer w0.254: v1(60.751,66.167) 60.751,106.934 62.132,108.315 R25.1 62.009,108.663 62.009,110.441 R37.2 61.833,117.078 64.008,119.253 64.008,120.142 v1(64.135,120.269) ; R28.1 66.675,141.478 v1(66.802,141.351)
Curr_fdbk1_OPAmp-: R33.2 U*1.11 | length 87.3
  Top Layer w0.254: v1(62.865,82.931) 64.008,81.788 v1(64.008,79.121) ; v1(62.865,103.886) 62.865,121.412 60.579,123.698 60.579,131.318 65.135,135.874 v1(65.135,138.541) ; v1@64.198,64.579 66.414,66.795 U*1.11
  Bottom Layer w0.254: R33.2 v1(65.135,138.541) ; v1(62.865,82.931) v1(62.865,103.886) ; v1(64.008,79.121) 64.072,79.057 64.072,64.706 v1(64.135,64.643)
Curr_fdbk2_OPAmp+: R26.1 R32.1 R38.2 U*1.15 | length 115.2
  Top Layer w0.254: v1(64.262,57.404) 69.215,57.404 72.461,60.65 U*1.15 ; R38.2@81.407,103.489 81.755,103.837 v1(81.755,105.631) 81.755,107.425 R26.1 83.944,107.712 87.205,110.973 87.205,141.141 v1(86.487,141.859)
  Bottom Layer w0.254: v1(64.262,57.404) 64.262,59.309 62.103,61.468 62.103,80.502 81.755,100.154 v1(81.755,105.631) ; R32.1 v1@86.36,141.859
Curr_fdbk2_OPAmp-: R34.2 U*1.13 | length 98.8
  Top Layer w0.254: v1(65.786,63.119) 70.866,63.119 71.461,63.714 U*1.13 ; v1(79.756,92.202) 79.756,94.234 81.153,95.631 83.82,95.631 v1(84.455,94.996) ; v1(86.233,113.411) v1(86.233,138.049)
  Bottom Layer w0.254: v1(65.786,63.119) 65.786,65.151 64.97,65.967 64.97,80.838 76.461,92.329 v1@79.883,92.329 ; v1(84.455,94.996) 84.455,97.663 86.233,99.441 v1(86.233,113.411) ; R34.2 85.741,138.541 v1(86.233,138.049)
Curr_fdbk3_OPAmp+: R27.1 R36.1 R39.2 U*1.17 | length 138
  Top Layer w0.254: v1(65.659,56.134) 66.167,56.642 69.723,56.642 73.461,60.38 U*1.17 ; R27.1@105.948,101.346 R27.1 104.346,99.49 v1(104.346,98.822) R39.2@106.331,98.822
  Bottom Layer w0.254: v1(65.659,56.134) 65.659,59.436 62.738,62.357 62.738,80.375 75.581,93.218 100.076,93.218 104.346,97.488 v1(104.346,98.822) 104.346,100.57 112.023,108.246 112.268,135.382 112.268,135.763 111.457,136.574 110.584,136.574 R36.1
Curr_fdbk3_OPAmp-: R35.2 U*1.19 | length 101.6
  Top Layer w0.254: U*1.19 74.461,61.429 75.184,60.706 76.422,60.706 77.597,61.881 77.597,62.611 78.105,63.119 89.535,63.119 96.52,70.104 96.52,81.026 98.933,83.439 98.933,94.191 v1(100.965,96.223)
  Bottom Layer w0.254: v1@100.965,96.096 v1(100.965,96.223) 100.965,98.171 110.843,108.049 R35.2
GND: *1.2 C1.2 C2.2 C3.2 C4.1 C6.1 C7.1 C8.1 C9.1 C10.1 C11.1 C12.1 C13.1 C14.1 C15.1 C17.1 C18.1 C19.1 C20.1 C21.1 C22.1 C23.1 C25.1 C26.1 C27.1 C28.1 C29.1 C30.1 C31.1 C32.1 C33.1 C34.1 C35.1 C36.1 C37.1 C38.1 C39.1 C40.1 C41.1 D1.2 J1.4 J2.6 J6.1 J6.2 J15.2 J16.2 J19.1 J19.2 LD1.1 LD2.1 LD3.1 LD4.1 LVL_Mx1.2 PB1.3 PB1.4 R23.1 R24.1 R29.1 R30.1 R31.1 R33.1 R34.1 R35.1 R37.1 R38.1 R39.1 R40.1 U1.1 U1.3 U*1.49 U*2.4 U*3.4 U*4.4 | length 255.4
  Top Layer w0.254: C1.2@27.377,112.776 C1.2 ; D1.2@28.679,136.893 29.327,137.541 D1.2 D1.2@29.079,138.189 ; *1.2 *1.2@29.079,145.597
  Top Layer w5: U1.1 27.631,102.181 C1.2 ; C1.2@27.377,112.776 C2.2 27.377,129.955 28.679,131.257 28.679,133.768 ; D1.2@28.679,136.893 28.679,133.768 ; *1.2 LVL_Mx1.2 ; D1.2@29.079,138.189 *1.2@29.079,145.597 ; v1(42.799,133.768) 28.679,133.768
  Bottom Layer w1: J1.4 112.014,153.249 112.014,143.002 114.046,140.97 J2.6@115.697,140.97 ; 111.887,89.535 115.443,93.091 J2.6
  Bottom Layer w2: *1.2 29.007,132.664 31.22,130.451 C33.1@31.22,107.061
  Bottom Layer w5: LVL_Mx1.2 29.007,155.397 LVL_Mx1.2@29.083,155.321 ; v1(42.799,133.768) 105.193,133.768 106.172,134.747
  other v1: 42.164,132.08 43.561,132.207 41.275,133.35 44.45,133.35 41.402,134.747 44.069,134.874 42.672,135.382
  other v2: 72.011,66.845 73.111,66.845 74.211,66.845 75.311,66.845 76.411,66.845 72.011,67.945 73.111,67.945 74.211,67.945 75.311,67.945 76.411,67.945 72.011,69.045 73.111,69.045 74.211,69.045 75.311,69.045 76.411,69.045 72.011,70.145 73.111,70.145 74.211,70.145 75.311,70.145 76.411,70.145 72.011,71.245 73.111,71.245 74.211,71.245 75.311,71.245 76.411,71.245
I2C_SCL: J1.1 R2.1 U*1.47 | length 131.5
  Top Layer w0.254: v1(69.088,77.47) 70.866,77.47 71.961,76.375 U*1.47 ; R2.1 86.227,88.916 v1@86.973,89.662 ; J1.1 99.648,155.749 106.426,148.971 106.426,143.002 108.458,140.97 108.458,131.572 108.839,131.191 108.839,125.349 109.728,124.46 109.728,96.139 108.458,94.869 104.394,94.869 v1@101.727,92.202
  Bottom Layer w0.254: v1@69.565,77.47 v1(69.088,77.47) 68.199,77.47 66.929,78.74 66.929,81.915 74.803,89.789 v1(86.973,89.789) 89.513,92.329 v1(101.727,92.329)
I2C_SDA: J1.2 R3.1 U*1.46 | length 132.4
  Top Layer w0.254: v1(71.882,78.232) 71.882,77.957 72.461,77.378 U*1.46 ; R3.1 81.632,88.9 83.283,87.249 86.459,87.249 v1@87.122,87.912 ; J1.2 102.148,154.138 106.934,149.352 106.934,143.383 108.912,141.405 108.912,131.772 109.347,131.337 109.347,125.603 110.236,124.714 110.236,96.005 107.703,93.472 v1(104.648,93.472)
  Bottom Layer w0.254: v1(71.882,78.232) 70.104,78.232 68.199,80.137 68.199,82.296 73.942,88.039 v1(87.122,88.039) 89.789,90.706 101.882,90.706 v1(104.648,93.472)
NetC5_1: C5.1 D2.1 U*2.8 | length 9.5
  Top Layer w0.254: C5.1 48.495,102.751 48.495,97.831 D2.1 49.933,97.558 51.087,98.712 U*2.8
NetC5_2: C5.2 U*2.6 | length 10.5
  Top Layer w0.254: v1(50.176,100.954) C5.2 ; v1(54.864,96.52) U*2.6
  Bottom Layer w0.254: v1(50.176,100.954) 54.483,96.647 v1@54.737,96.647
NetC6_2: C6.2 Q1.2 U*1.5 | length 24
  Top Layer w0.254: C6.2 49.875,72.612 51.355,74.092 Q1.2 ; Q1.2@56.134,72.949 56.134,71.199 57.538,69.795 U*1.5
NetC9_2: C9.2 Q1.1 U*1.6 | length 25.2
  Top Layer w0.254: C9.2 49.875,63.7 50.056,63.881 55.423,63.881 Q1.1 56.134,67.818 57.611,69.295 U*1.6
NetC13_2: C13.2 R6.1 | length 5.1
  Top Layer w0.254: R6.1@60.977,119.54 R6.1 ; C13.2@61.325,115.327 C13.2
  Top Layer w0.5: C13.2@61.325,115.327 R6.1
NetC16_1: C16.1 D3.1 U*3.8 | length 9.4
  Top Layer w0.254: C16.1 68.205,102.229 68.205,97.563 D3.1 68.326,97.542 68.599,97.815 68.699,97.815 69.353,98.469 U*3.8
NetC16_2: C16.2 U*3.6 | length 10.5
  Top Layer w0.254: v1@69.607,100.7 C16.2 ; v1(74.295,96.139) 74.358,96.203 74.358,98.406 U*3.6
  Bottom Layer w0.254: v1(69.85,100.457) v1@74.211,96.096
NetC21_2: C21.2 R11.1 | length 4.7
  Top Layer w0.254: C21.2@82.915,117.121 C21.2
  Top Layer w0.5: C21.2@82.915,117.121 R11.1
NetC24_1: C24.1 D4.1 U*4.8 | length 8.7
  Top Layer w0.254: C24.1 86.846,98.215 D4.1 86.973,98.088 U*4.8
NetC24_2: C24.2 U*4.6 | length 10.3
  Top Layer w0.254: v1@88.646,100.838 C24.2 ; v1(93.345,96.096) U*4.6
  Bottom Layer w0.254: v1(88.9,100.584) v1@93.345,96.139
NetC28_2: C28.2 R20.1 | length 4.7
  Top Layer w0.5: C28.2@108.696,118.845 R20.1
NetLD1_2: LD1.2 R14.2 | length 5
  Top Layer w0.254: LD1.2 26.937,40.132 28.985,38.084 R14.2
NetLD2_2: LD2.2 R15.2 | length 5.1
  Top Layer w0.254: LD2.2 27.735,28.018 28.481,28.018 R15.2
NetLD3_2: LD3.2 R16.2 | length 4.2
  Top Layer w0.254: R16.2 108.552,60.562 112.251,60.562 LD3.2
NetLD4_2: LD4.2 R19.2 | length 5.4
  Top Layer w0.254: LD4.2 26.05,49.784 27.343,48.491 27.343,48.473 28.985,46.831 R19.2
NetR4_1: R4.1 U*2.7 | length 4.9
  Top Layer w0.254: U*2.7 53.594,100.838 54.721,101.965 R4.1
NetR4_2: R4.2 R5.2 T1.1 | length 17.6
  Top Layer w0.254: R5.2 44.196,116.373 T1.1 49.534,107.679 52.721,104.492 R4.2
NetR7_1: R7.1 U*2.5 | length 18.3
  Top Layer w0.254: U*2.5 56.134,100.203 v1(57.531,101.6)
  Bottom Layer w0.254: R7.1 54.213,104.918 v1(57.531,101.6)
NetR7_2: R7.2 R8.2 T2.1 | length 31
  Top Layer w0.254: v1(43.942,109.093) 41.91,111.125 41.91,121.92 44.45,124.46 R8.2
  Top Layer w0.5: R8.2 46.121,126.889 49.534,130.302 T2.1
  Bottom Layer w0.254: v1(43.942,109.093) 43.942,107.045 R7.2
NetR9_1: R9.1 U*3.7 | length 7.4
  Top Layer w0.254: U*3.7 73.152,102.108 74.82,103.776 74.82,104.681 R9.1
NetR9_2: R9.2 R10.2 T3.1 | length 13.2
  Top Layer w0.254: R10.2 65.956,111.831 66.879,110.908 T3.1 70.98,110.794 70.98,107.442 73.168,105.254 R9.2
NetR12_1: R12.1 U*3.5 | length 15.1
  Top Layer w0.254: U*3.5 75.755,98.533 75.755,100.901 v1(75.819,100.965)
  Bottom Layer w0.254: R12.1 71.612,106.188 75.819,101.981 v1(75.819,100.965)
NetR12_2: R12.2 R13.2 T4.1 | length 31.5
  Top Layer w0.254: v1(65.786,109.728) 64.262,111.252 64.262,117.856 65.786,119.38 65.786,124.587 64.389,125.984 R13.2 65.405,127.127 T4.1@70.802,132.525 ; T4.1@70.493,130.979 70.866,131.352 T4.1
  Bottom Layer w0.254: v1(65.786,109.728) 65.786,108.442 R12.2
NetR17_1: R17.1 U*4.7 | length 4.4
  Top Layer w0.254: U*4.7 92.075,101.486 92.599,102.01 R17.1
NetR17_2: R17.2 R18.2 T5.1 | length 21.1
  Top Layer w0.254: R18.2 90.424,115.427 92.932,112.919 96.623,112.919 97.028,113.324 T5.1 97.028,108.077 94.599,105.648 R17.2
NetR21_1: R21.1 U*4.5 | length 15.9
  Top Layer w0.254: U*4.5 94.615,98.563 101.335,105.283 v1(104.14,105.283)
  Bottom Layer w0.254: v1(104.14,105.283) 105.156,105.283 106.569,106.696 R21.1
NetR21_2: R21.2 R22.2 T6.1 | length 43
  Top Layer w0.254: T6.1 97.028,135.168 100.052,138.192 R22.2 106.807,131.064 107.442,130.429 v1(107.696,130.429)
  Bottom Layer w0.254: R21.2 106.905,108.696 107.253,109.044 107.253,109.269 107.696,109.712 v1(107.696,130.429)
NRST: C14.2 J13.1 U*1.7 | length 26.9
  Top Layer w0.254: C14.2@52.07,57.15 54.356,57.15 58.928,61.722 58.928,67.564 60.159,68.795 U*1.7
OP1_OUT: TP2.1 U*1.10 | length 22.2
  Top Layer w0.254: TP2.1 62.101,60.364 62.101,66.546 62.85,67.295 U*1.10
OP2_OUT: TP1.1 U*1.14 | length 17.9
  Top Layer w0.254: TP1.1 61.511,56.896 66.162,61.547 71.961,61.547 U*1.14
OP3_OUT: TP3.1 U*1.18 | length 14.1
  Top Layer w0.254: TP3.1 70.696,55.329 72.474,55.329 74.803,57.658 74.803,60.071 73.961,60.913 U*1.18
OUT1: J12.3 R5.1 R6.2 T1.3 T2.2 TP4.1 | length 57.9
  Top Layer w1: R5.1@44.269,119.31 T1.3@50.099,119.31 ; T1.3@53.413,119.945 R6.2@59.243,119.945
  Top Layer w5: T1.3@50.099,119.31 T1.3 54.864,124.075 54.864,132.588 56.769,132.588 61.087,136.906 61.087,148.336 TP4.1 67.564,154.813 J12.3@67.564,157.226
OUT2: J12.2 R10.1 R11.2 T3.3 T4.2 TP5.1 | length 57.5
  Top Layer w1: R10.1@65.956,115.3 65.956,117.993 T3.3@68.486,120.523 ; T3.3@77.851,121.793 R11.2@80.518,121.793
  Top Layer w5: T3.3 73.925,121.158 75.9,123.133 75.9,132.588 80.137,132.588 82.169,134.62 TP5.1 80.391,151.003 76.581,151.003 73.486,154.098 J12.2
OUT3: J12.1 R18.1 R20.2 T5.3 T6.2 TP6.1 | length 64.2
  Top Layer w0.5: R18.1 91.948,120.142 T5.3@95.123,120.142 ; T5.3@103.251,123.825 R20.2@106.426,123.825
  Top Layer w5: 79.575,157.353 83.058,157.353 90.551,149.86 90.551,130.291 98.668,122.174 T5.3 ; T5.3@102.108,124.149 T6.2
POTENTIOMETER: C15.2 R40.2 U*1.25 | length 40.1
  Top Layer w0.254: U*1.25 78.612,66.295 80.772,64.135 89.027,64.135 94.361,69.469 v1@94.361,73.025 ; C15.2 100.131,73.694 R40.2
  Bottom Layer w0.254: v1(94.361,73.152) 94.636,73.152 95.178,73.694 R40.2
SPI2_CSn: J2.1 U*1.40 | length 108
  Top Layer w0.254: U*1.40 75.461,76.869 v1@76.062,77.47 ; v1(81.788,78.105) 83.493,78.105 v1@88.573,83.185 ; v1(100.711,89.662) 101.854,89.662 104.267,92.075 106.948,92.075 110.69,95.817 110.69,124.902 109.801,125.791 109.801,131.525 109.366,131.96 109.366,147.466 J2.1
  Bottom Layer w0.254: v1(76.062,77.597) 76.135,77.67 81.226,77.67 v1@81.661,78.105 ; v1(88.573,83.312) 91.382,83.312 97.732,89.662 v1(100.711,89.662)
SPI2_MISO: J2.3 U*1.27 | length 111.6
  Top Layer w0.254: U*1.27 80.145,67.295 81.145,66.295 84.2,66.295 84.836,65.659 88.011,65.659 89.789,67.437 89.789,79.147 91.476,80.834 92.391,80.834 v1@94.107,82.55 ; v1(105.283,89.535) 106.299,89.535 111.633,94.869 111.633,125.243 110.763,126.113 110.763,131.847 110.309,132.301 110.309,146.504 112.268,148.463 115.189,148.463 115.316,148.336 J2.3
  Bottom Layer w0.254: v1(94.107,82.677) 98.679,87.249 102.997,87.249 v1@105.156,89.408
SPI2_MOSI: J2.2 U*1.33 | length 104.3
  Top Layer w0.254: U*1.33 81.05,70.295 83.058,72.303 v1@83.058,72.517 ; v1(84.455,75.692) 90.142,81.379 90.936,81.379 v1@92.075,82.518 ; v1(103.251,89.408) 105.156,91.313 106.934,91.313 111.144,95.523 111.144,125.09 110.309,125.925 110.309,131.659 109.855,132.113 109.855,147.313 113.545,151.003 J2.2
  Bottom Layer w0.254: v1(83.058,72.644) 83.058,74.295 84.201,75.438 v1@84.201,75.819 ; v1(92.075,82.645) 97.695,88.265 102.235,88.265 v1@103.251,89.281
SPI2_SCK: J2.4 U*1.26 | length 110.8
  Top Layer w0.254: U*1.26 79.89,66.795 80.899,65.786 84.067,65.786 84.648,65.205 88.446,65.205 90.424,67.183 90.424,78.994 91.694,80.264 94.234,80.264 v1@95.631,81.661 ; v1(109.474,91.059) 112.141,93.726 112.141,125.476 111.217,126.4 111.217,132.035 110.871,132.381 110.871,145.542 111.252,145.923 J2.4
  Bottom Layer w0.254: v1(95.631,81.788) 100.638,86.795 105.21,86.795 v1(109.474,91.059)
STATUS: R16.1 U*1.29 | length 34.6
  Top Layer w0.254: U*1.29 81.311,68.295 81.788,67.818 86.106,67.818 86.741,67.183 v1(87.757,67.183) ; v1(108.077,64.897) 108.204,64.77 R16.1
  Bottom Layer w0.254: v1(87.757,67.183) 105.664,67.183 v1@108.077,64.77
SWCLK: J8.1 U*1.37 | length 47.5
  Top Layer w0.254: U*1.37 76.961,73.913 v1@78.359,75.311
  Bottom Layer w0.254: J8.1 72.263,35.814 71.755,36.322 71.755,38.195 78.486,44.926 v1(78.486,75.152)
SWDIO: J8.2 U*1.36 | length 40.9
  Top Layer w0.254: U*1.36 79.034,71.795 79.502,72.263 v1(79.502,73.66)
  Bottom Layer w0.254: J8.2 79.502,43.815 v1(79.502,73.66)
TIM1_CH1: C11.2 J4.2 U*1.30 U*2.2 | length 59.3
  Top Layer w0.254: U*2.2 53.594,91.223 56.758,88.059 C11.2 56.758,86.117 58.039,84.836 69.977,84.836 71.565,83.248 J4.2 ; U*1.30 77.713,68.797 85.18,68.797 v1(85.217,68.834)
  Bottom Layer w0.254: J4.2 73.47,79.375 82.55,79.375 86.741,75.184 86.741,69.469 86.106,68.834 v1(85.217,68.834) v1@85.217,68.707
TIM1_CH1N: C10.2 J4.1 U*1.2 U*2.1 | length 42.4
  Top Layer w0.254: U*2.1 52.324,87.111 C10.2 52.44,85.609 53.975,84.074 68.453,84.074 69.565,82.962 J4.1 69.565,79.725 66.802,76.962 66.802,71.773 67.28,71.295 U*1.2
TIM1_CH2: C19.2 J4.4 U*1.31 U*3.2 | length 35.3
  Top Layer w0.254: U*3.2 73.152,91.361 76.062,88.451 C19.2 75.664,87.878 75.664,81.379 J4.4 76.2,81.28 76.2,80.862 84.201,72.861 84.201,69.85 83.646,69.295 U*1.31
TIM1_CH2N: C18.2 J4.3 U*1.34 U*3.1 | length 30.9
  Top Layer w0.254: U*3.1 71.882,87.663 C18.2 71.733,86.826 73.565,84.994 J4.3 75.089,79.756 76.447,79.756 81.915,74.288 81.915,71.882 80.828,70.795 U*1.34
TIM1_CH3: C26.2 J4.6 U*1.32 U*4.2 | length 45.9
  Top Layer w0.254: U*1.32 81.733,69.795 82.296,70.358 v1@82.296,70.485 ; v1(85.471,70.358) 85.471,72.39 79.565,78.296 J4.6 79.565,82.74 82.042,85.217 C26.2 93.704,88.668 92.075,90.297 U*4.2
  Bottom Layer w0.254: v1(82.677,70.358) v1(85.471,70.358)
TIM1_CH3N: C25.2 J4.5 U*1.28 U*4.1 | length 51.2
  Top Layer w0.254: J4.5 77.565,82.518 81.026,85.979 87.989,85.979 C25.2 89.922,87.912 89.922,89.16 90.805,90.043 U*4.1 ; U*1.28 80.403,67.795 81.396,66.802 v1(85.471,66.802)
  Bottom Layer w0.254: J4.5 78.962,79.883 83.693,79.883 87.503,76.073 87.503,68.623 v1@85.725,66.845
USART2_RX: J10.1 U*1.42 | length 39
  Top Layer w0.254: v1@73.66,76.962 74.461,76.161 U*1.42
  Bottom Layer w0.254: 66.929,45.466 66.929,70.405 v1(73.486,76.962)
USART2_TX: J10.2 U*1.41 | length 43.5
  Top Layer w0.254: v1(74.295,78.359) 74.359,78.359 74.961,77.757 U*1.41
  Bottom Layer w0.254: 67.383,45.212 67.383,70.177 72.39,75.184 74.007,75.184 74.803,75.98 74.803,77.089 74.489,77.403 74.489,78.165 v1(74.295,78.359)
USB_D+: J7.1 J7.2
USB_D-: J9.1 J9.2
V+: *1.1 C1.1 C2.1 C33.2 C34.2 C35.2 C36.2 C37.2 C38.2 C39.2 C40.2 C41.2 D1.1 LVL_Mx1.1 T1.2 T3.2 T5.2 U1.2 | length 176.7
  Top Layer w5: v1@55.372,111.035 v1(55.499,110.908) ; T3.2@76.2,110.781 76.29,110.871 v1(76.327,110.871) ; v1(102.272,111.887) v1@102.616,111.887
  Bottom Layer w5: LVL_Mx1.1@34.798,156.972 34.798,155.8 35.322,155.276 35.322,146.669 *1.1 36.322,127.254 ; U1.2@40.132,97.409 36.322,101.219 36.322,112.522 36.322,114.427 36.322,125.222 36.322,127.254 ; v1@55.499,110.871 v1(55.499,110.908) 55.499,127.254 ; v1(76.327,110.871) 76.327,127.127 76.2,127.254 ; v1@102.489,112.014 102.489,127.254 76.2,127.254 ; 36.322,127.254 55.499,127.254 ; 55.499,127.254 76.2,127.254
  other v1: 76.454,109.093 54.991,109.347 74.93,109.728 56.769,109.855 77.862,110.109 102.108,110.236 53.848,110.744 103.759,110.908 100.711,111.252 74.803,111.379 57.023,111.506 77.565,111.76 54.24,112.268 76.062,112.395 35.56,112.522 37.719,112.522 55.88,112.649 100.838,112.903 103.886,112.903 102.362,113.411 35.433,128.524 37.846,128.524 34.544,137.541
Vshunt_1+: R8.1 R28.2 R29.2 T2.3 | length 21.4
  Top Layer w0.5: R8.1 46.736,131.175 46.736,138.691 T2.3@51.174,143.129
  Top Layer w5: T2.3@51.174,143.129 T2.3
  Bottom Layer w1: R29.2 59.423,140.462 59.944,140.462 60.96,141.478 R28.2@62.119,141.478
  other v1: 48.895,140.081 52.07,140.081 55.245,140.081 52.07,142.24 55.245,142.24 48.895,144.399 52.07,144.399 55.245,144.399 48.895,146.431 52.07,146.431 55.245,146.431
Vshunt_2+: R13.1 R30.2 R32.2 T4.3 | length 15.8
  Top Layer w0.5: R13.1 64.389,131.826 70.104,137.541 v1(70.104,139.446)
  Bottom Layer w1: R30.2 81.039,141.859 R32.2
  other v1: 73.66,139.446 76.708,139.446 69.977,141.097 73.533,141.097 76.581,141.097 70.104,142.748 73.66,142.748 76.708,142.748 70.104,144.399 73.66,144.399 76.708,144.399 70.104,146.177 73.66,146.177 76.708,146.177
Vshunt_3+: R22.1 R31.2 R36.2 T6.3 | length 4.2
  Bottom Layer w1: R31.2 108.066,140.83 R36.2@109.843,139.053
  other v1: 96.393,140.97 99.949,140.97 102.997,140.97 96.393,142.621 99.949,142.621 102.997,142.621 96.266,144.272 99.822,144.272 102.87,144.272 96.266,145.796 99.822,145.796 102.87,145.796 96.266,147.447 99.822,147.447 102.87,147.447
pads on no net: J11.1 J11.2 J14.1 J14.2 R23.4 R24.4 R40.4 U*1.3 U*1.4 U*1.8 U*1.12 U*1.16 U*1.22 U*1.24 U*1.38 U*1.43 U*1.44 U*1.45
copper on no net: | length 520.4
  Top Layer w0.254: 69.088,70.295 69.83,70.295 70.711,70.295 ; 69.088,70.795 70.711,70.795 ; 69.134,66.295 69.83,66.295 70.711,66.295 ; 69.134,68.295 70.711,68.295 ; 72.961,64.135 72.961,65.545 ; 72.961,72.545 72.961,75.692 ; 73.449,74.416 73.461,73.426 73.461,72.545 ; 73.939,74.422 73.961,72.545 ; 75.961,64.135 75.961,64.664 75.961,65.545 ; 76.461,72.545 76.461,74.041 ; 76.961,64.135 76.961,65.545 ; 18.161,12.827 18.161,162.433 119.253,162.433 119.253,12.827 18.161,12.827
  other v3: 21.717,16.383 116.205,16.383 116.205,158.369 21.717,158.623

## Other copper
Bottom Layer:
  rectangle net Vshunt_3+: 94.234,139.573 104.902,148.463
  rectangle net Vshunt_2+: 67.945,138.557 78.867,147.574
  rectangle net Vshunt_1+: 46.482,138.684 57.531,147.828

## Text inside footprints (layer, text, board x,y; h text height)
J1: Top Overlay "1" at 99.378,159.51 h1; Mechanical 14 "1" at 99.378,159.51 h1
J2: Top Overlay "1" at 116.838,153.763 h1 r270; Mechanical 14 "1" at 116.838,153.763 h1 r270
J7: Top Overlay "1" at 93.386,26.045 h1.2
J8: Top Overlay "1" at 71.669,35.316 h1.2
J9: Top Overlay "1" at 86.274,19.822 h1.2
J10: Top Overlay "1" at 65.954,36.967 h1.2
J11: Top Overlay "1" at 77.13,22.108 h1.2
J12: Top Overlay "1" at 78.766,161.402 h1 r180; Top Overlay "2" at 73.767,161.402 h1 r180; Top Overlay "3" at 68.706,161.402 h1 r180; Mechanical 14 "1" at 78.766,161.402 h1 r180; Mechanical 14 "2" at 73.767,161.402 h1 r180; Mechanical 14 "3" at 68.706,161.402 h1 r180
J13: Top Overlay "1" at 52.746,34.808 h1.2
J14: Top Overlay "1" at 103.673,35.189 h1.2
J15: Top Overlay "1" at 91.608,35.951 h1.2
J16: Top Overlay "1" at 97.196,35.951 h1.2
J18: Top Overlay "1" at 83.226,36.459 h1.2
J19: Top Overlay "1" at 60.239,36.459 h1.2
U1: Top Overlay "-" at 23.687,62.595 h1.52 r180; Top Overlay "+" at 40.959,62.595 h1.52 r180; Top Overlay "+" at 40.859,96.109 h1.52 r180; Top Overlay "-" at 23.559,96.209 h1.52 r180; Top Overlay "Input" at 34.203,96.885 h2.54 r180; Top Overlay "Output" at 27.751,60.03 h2.54